# EAGLE board motors_ctrl (EAGLE 5.10)
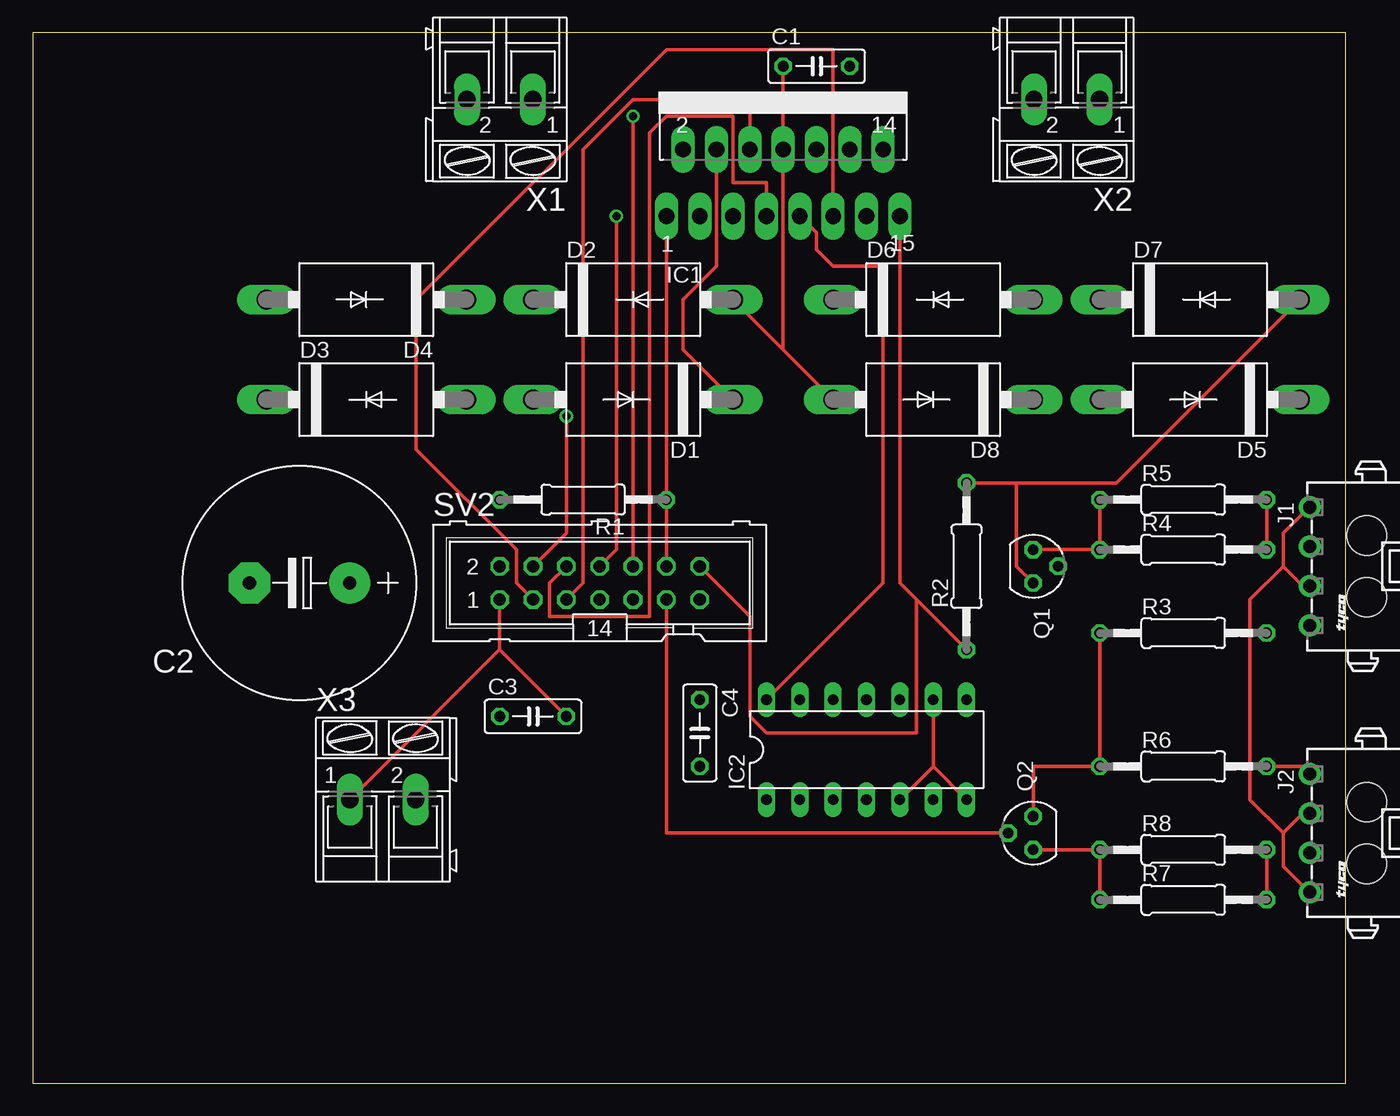
[diagram p0: board, top side]
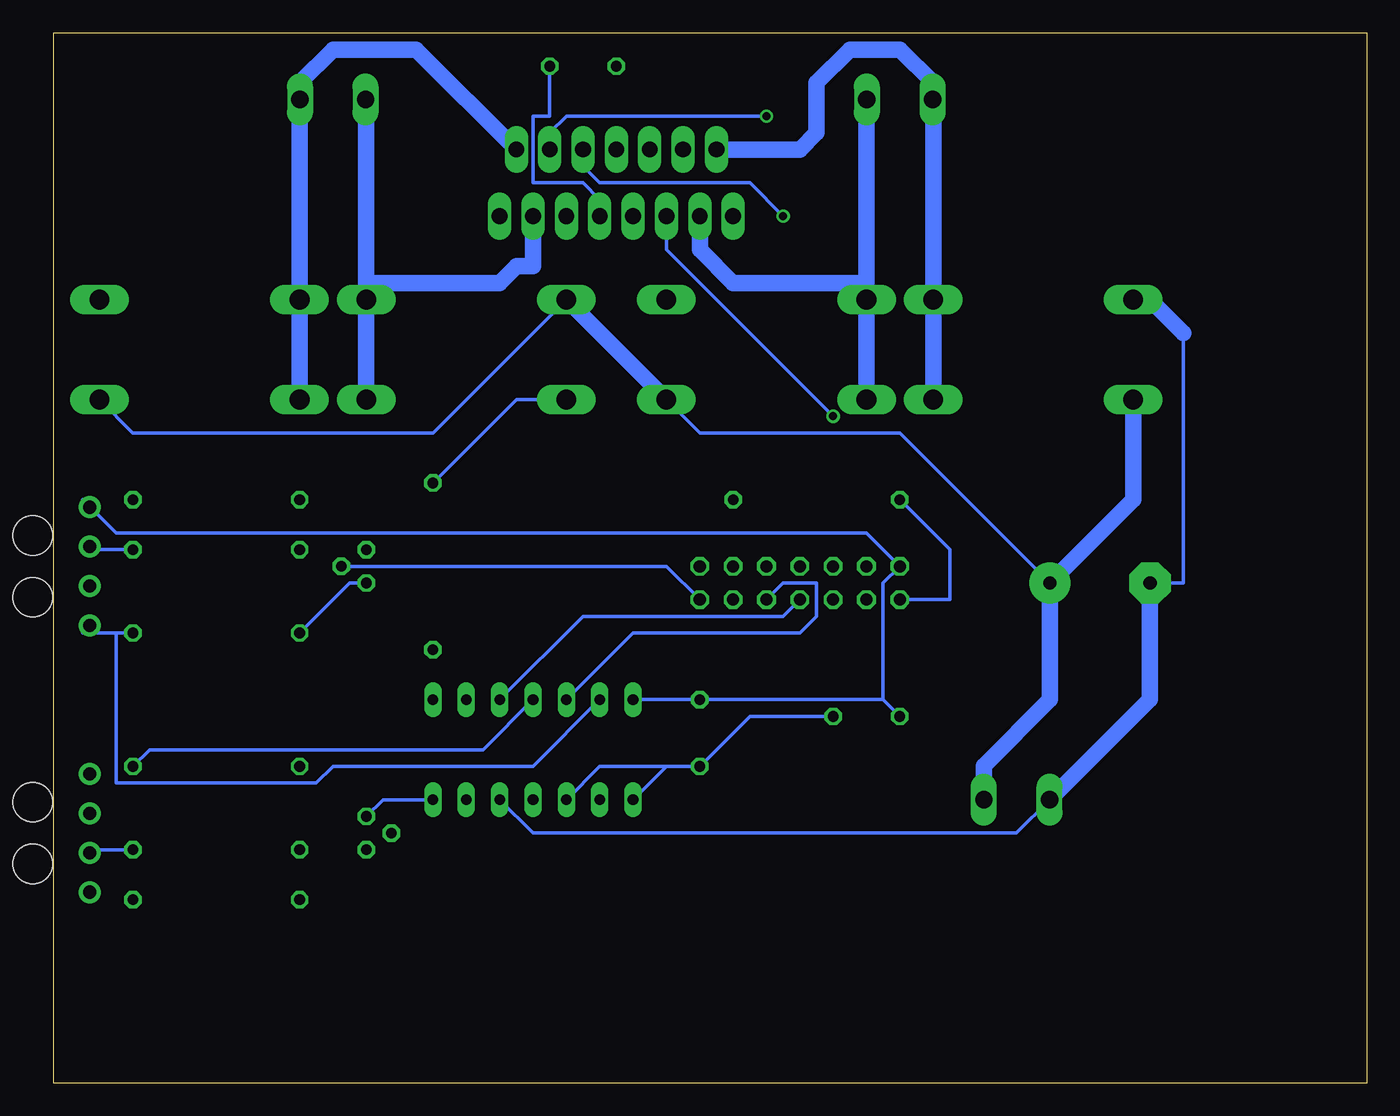
[diagram p1: board, bottom side, seen from below]

Size 100 x 80 mm. Coordinates in mm from the lower left corner, seen from the top.
Outline: 0,0 100,0 100,80 0,80 0,0
Copper layers (1*16): Top 0.035mm / dielectric 1.5mm / Bottom 0.035mm
Design rules "default": minimum track width 10mil, minimum drill 24mil, track to track 8mil, track to pad 8mil, pad to pad 8mil, via to via 8mil, smd to smd 8mil, copper to edge 40mil, drill to drill 8mil, minimum pad ring 10mil, minimum via ring 8mil, stop-mask expansion 4mil, vias tented up to drill 0mil, thermal gap 10mil

## Footprints (pad centres in the part's own frame; a part is rotated, then mirrored left to right if it is on the bottom)
C050-025X075 = drill 0.813 octagon: 1 -2.54,0; 2 2.54,0
E7,5-18 = drill 1.016 pad 3.15 round: + -3.81,0 | drill 1.016 pad 3.15 octagon: - 3.81,0
DO201-15 = drill 1.499 long: A 7.62,0; C -7.62,0
MULTIWATT-15 = drill 1.2 long: 1 -8.89,-7.62; 2 -7.62,-2.54; 3 -6.35,-7.62; 4 -5.08,-2.54; 5 -3.81,-7.62; 6 -2.54,-2.54; 7 -1.27,-7.62; 8 0,-2.54; 9 1.27,-7.62; 10 2.54,-2.54; 11 3.81,-7.62; 12 5.08,-2.54; 13 6.35,-7.62; 14 7.62,-2.54; 15 8.89,-7.62
DIL14 = drill 0.813 long: 1 -7.62,-3.81; 2 -5.08,-3.81; 3 -2.54,-3.81; 4 0,-3.81; 5 2.54,-3.81; 6 5.08,-3.81; 7 7.62,-3.81; 8 7.62,3.81; 9 5.08,3.81; 10 2.54,3.81; 11 0,3.81; 12 -2.54,3.81; 13 -5.08,3.81; 14 -7.62,3.81
1445055-4 = drill 1 pad 1.676 round: 1 4.5,4.32; 2 1.5,4.32; 3 -1.5,4.32; 4 -4.5,4.32 | hole 3: -2.35,0; 2.35,0
SOT54E = drill 0.813 octagon: D -1.27,0; G 0,1.905; S 1.27,0
0207/12 = drill 0.813 octagon: 1 -6.35,0; 2 6.35,0
ML14 = drill 0.914 octagon: 1 -7.62,-1.27; 2 -7.62,1.27; 3 -5.08,-1.27; 4 -5.08,1.27; 5 -2.54,-1.27; 6 -2.54,1.27; 7 0,-1.27; 8 0,1.27; 9 2.54,-1.27; 10 2.54,1.27; 11 5.08,-1.27; 12 5.08,1.27; 13 7.62,-1.27; 14 7.62,1.27
AK300/2 = drill 1.321 long: 1 -2.515,0; 2 2.489,0

## Placement (x,y rotation side)
C1  100nF  [C050-025X075]  59.69,77.47 0 top
C2  [E7,5-18]  20.32,38.1 180 top
C3  10nF  [C050-025X075]  38.1,27.94 0 top
C4  10nF  [C050-025X075]  50.8,26.67 270 top
D1  6A10  [DO201-15]  45.72,52.07 180 top
D2  6A10  [DO201-15]  45.72,59.69 0 top
D3  6A10  [DO201-15]  25.4,52.07 0 top
D4  6A10  [DO201-15]  25.4,59.69 180 top
D5  6A10  [DO201-15]  88.9,52.07 180 top
D6  6A10  [DO201-15]  68.58,59.69 0 top
D7  6A10  [DO201-15]  88.9,59.69 0 top
D8  6A10  [DO201-15]  68.58,52.07 180 top
IC1  L298  [MULTIWATT-15]  57.15,73.66 0 top
IC2  7414N  [DIL14]  63.5,25.4 0 top
J1  TCST1103 (+,E,+,D)  [1445055-4]  101.6,39.37 90 top
J2  TCST1103 (+,E,+,D)  [1445055-4]  101.6,19.05 90 top
Q1  BS170  [SOT54E]  76.2,39.37 270 top
Q2  BS170  [SOT54E]  76.2,19.05 90 top
R1  10kR  [0207/12]  41.91,44.45 180 top
R2  10kR  [0207/12]  71.12,39.37 90 top
R3  100R  [0207/12]  87.63,34.29 0 top
R4  100R  [0207/12]  87.63,40.64 0 top
R5  100R  [0207/12]  87.63,44.45 0 top
R6  100R  [0207/12]  87.63,24.13 0 top
R7  100R  [0207/12]  87.63,13.97 0 top
R8  100R  [0207/12]  87.63,17.78 0 top
SV2  [ML14]  43.18,38.1 0 top
X1  [AK300/2]  35.56,74.93 180 top
X2  [AK300/2]  78.74,74.93 180 top
X3  [AK300/2]  26.67,21.59 0 top

## Library data of the parts
C1-C4 R1-R8 = rcl
D1-D8 = diode
IC1 = st-microelectronics
IC2 = 74xx-eu
J1 J2 = con-amp
Q1 Q2 = transistor-small-signal
SV2 = con-harting-ml
X1-X3 = con-ptr500

## Nets
0V: C1.1 C2.- C3.2 C4.2 D2.A D4.A D7.A D8.A IC1.8 IC2.1 IC2.3 IC2.5 IC2.7 IC2.9 Q1.S Q2.S R1.2 R2.2 R3.1 R6.1 SV2.1 X3.1
+5V: C1.2 C3.1 C4.1 IC1.9 IC2.14 J1.1 J1.3 J2.2 J2.4 SV2.2
+9V: C2.+ D1.C D3.C D5.C D6.C IC1.4 X3.2
N$1: D1.A D2.C IC1.3 X1.1
N$2: D3.A D4.C IC1.2 X1.2
N$3: D6.A D8.C IC1.13 X2.2
N$4: D5.A D7.C IC1.14 X2.1
N$5: IC1.15 R2.1 SV2.14
N$6: IC1.1 R1.1 SV2.12
N$7: IC1.12 SV2.10
N$8: IC1.10 SV2.8
N$9: IC1.7 SV2.6
N$10: IC1.5 SV2.4
N$11: IC1.6 SV2.5
N$12: IC1.11 SV2.3
N$13: Q1.G SV2.13
N$14: IC2.13 J1.4 R3.2
N$15: J1.2 R4.2 R5.2
N$16: Q1.D R4.1 R5.1
N$17: IC2.12 SV2.9
N$18: IC2.11 J2.1 R6.2
N$20: J2.3 R7.2 R8.2
N$21: Q2.D R7.1 R8.1
N$22: Q2.G SV2.11
N$23: IC2.10 SV2.7

## Tracks (layer width: path | path; a pad name or v marks a point on that pad's centre or on a via)
0V
  Top 0.254: 35.56,33.02 C3.2 | 35.56,33.02 SV2.1 | 35.56,33.02 24.13,21.59 X3.1 | IC2.5 68.58,24.13 | 68.58,24.13 IC2.9 | 68.58,24.13 IC2.7 | Q2.S 76.2,24.13 R6.1 R3.1 | C1.1 IC1.8 57.15,55.88 | D8.A 57.15,55.88 | 57.15,55.88 D2.A | D7.A 82.55,45.72 74.93,45.72 | 74.93,45.72 R2.2 | Q1.S 74.93,39.37 74.93,45.72
  Bottom 0.254: 13.97,57.15 13.97,38.1 C2.- | 53.34,24.13 IC2.1 | 53.34,24.13 C4.2 46.99,27.94 C3.2 | IC2.3 58.42,24.13 53.34,24.13 | R1.2 31.75,40.64 31.75,36.83 SV2.1 | Q2.S 74.93,21.59 IC2.7 | R3.1 77.47,38.1 Q1.S | R2.2 64.77,52.07 D8.A | 24.13,21.59 26.67,19.05 63.5,19.05 IC2.5
  Bottom 0.406: X3.1 24.13,21.59
  Bottom 1.27: C2.- 16.51,29.23 X3.1 | D4.A 16.51,59.69 13.97,57.15
+5V
  Top 0.254: 95.25,19.05 95.25,16.51 97.79,13.97 J2.4 | 95.25,19.05 96.52,20.32 J2.2 | 95.25,39.37 96.52,38.1 J1.3 | 95.25,39.37 95.25,41.91 97.79,44.45 J1.1 | 95.25,19.05 92.71,21.59 92.71,36.83 95.25,39.37 | IC1.9 59.69,64.77 59.69,63.5 60.96,62.23 64.77,62.23 64.77,38.1 IC2.14
  Bottom 0.254: C1.2 62.23,73.66 63.5,73.66 63.5,68.58 59.69,68.58 58.42,67.31 IC1.9 | C3.1 36.83,29.21 | 36.83,29.21 C4.1 IC2.14 | 36.83,29.21 36.83,38.1 SV2.2 38.1,41.91 95.25,41.91 97.79,44.45 J1.1
+9V
  Top 0.254: IC1.4 52.07,62.23 49.53,59.69 49.53,55.88 D1.C
  Bottom 0.254: D5.C 93.98,49.53 71.12,49.53 D6.C | C2.+ 35.56,49.53 50.8,49.53 D1.C
  Bottom 1.27: D3.C 17.78,44.45 C2.+ 24.13,29.21 29.16,24.18 X3.2 | D1.C D6.C
N$1
  Bottom 0.254: 38.1,74.93 X1.1
  Bottom 1.27: D1.A D2.C 38.1,60.96 | 38.1,60.96 38.1,74.93 | IC1.3 50.8,63.5 48.26,60.96 38.1,60.96
N$2
  Bottom 1.27: D3.A D4.C 33.02,74.88 X1.2 33.02,74.93 33.02,76.2 35.56,78.74 39.37,78.74 41.91,76.2 41.91,72.39 43.18,71.12 IC1.2
N$3
  Bottom 1.27: X2.2 76.2,74.93 76.2,60.96 | 76.2,60.96 D6.A D8.C | IC1.13 63.5,62.23 64.77,62.23 66.04,60.96 76.2,60.96
N$4
  Bottom 1.27: D5.A D7.C 81.28,74.93 X2.1 81.28,74.95 81.28,76.2 78.74,78.74 72.39,78.74 IC1.14
N$5
  Top 0.254: 67.31,36.83 66.04,38.1 IC1.15 | 67.31,36.83 R2.1 | SV2.14 54.61,35.56 54.61,27.94 55.88,26.67 67.31,26.67 67.31,36.83
N$6
  Top 0.254: SV2.12 R1.1 IC1.1
N$7  (via drill 0.61)
  Top 0.254: SV2.10 v45.72,73.66
  Bottom 0.254: v45.72,73.66 60.96,73.66 62.23,72.39 IC1.12
N$8  (via drill 0.61)
  Top 0.254: SV2.8 44.45,40.64 v44.45,66.04
  Bottom 0.254: v44.45,66.04 46.99,68.58 58.42,68.58 59.69,69.85 IC1.10
N$9
  Top 0.254: SV2.6 39.37,38.1 39.37,35.56 46.99,35.56 46.99,72.39 48.26,73.66 53.34,73.66 53.34,68.58 55.88,68.58 IC1.7
N$10  (via drill 0.61)
  Top 0.254: SV2.4 40.64,41.91 v40.64,50.8
  Bottom 0.254: v40.64,50.8 53.34,63.5 IC1.5
N$11
  Top 0.254: SV2.5 41.91,38.1 41.91,71.12 45.72,74.93 54.61,74.93 IC1.6
N$12
  Top 0.254: SV2.3 36.83,38.1 36.83,40.64 29.21,48.26 29.21,59.69 48.26,78.74 60.96,78.74 IC1.11
N$13
  Bottom 0.254: SV2.13 53.34,39.37 Q1.G
N$14
  Bottom 0.254: IC2.13 63.5,24.13 78.74,24.13 80.01,22.86 95.25,22.86 95.25,34.29 | 95.25,34.29 R3.2 | 95.25,34.29 97.79,34.29 J1.4
N$15
  Top 0.254: R4.2 R5.2
  Bottom 0.254: R4.2 96.52,40.64 J1.2
N$16
  Top 0.254: Q1.D R4.1 R5.1
N$17
  Bottom 0.254: IC2.12 55.88,34.29 43.18,34.29 41.91,35.56 41.91,38.1 44.45,38.1 SV2.9
N$18
  Top 0.254: R6.2 97.79,24.13 J2.1
  Bottom 0.254: IC2.11 67.31,25.4 92.71,25.4 R6.2
N$20
  Top 0.254: R7.2 R8.2
  Bottom 0.254: R8.2 96.52,17.78 J2.3
N$21
  Top 0.254: Q2.D R8.1 R7.1
N$22
  Top 0.254: SV2.11 48.26,19.05 Q2.G
N$23
  Bottom 0.254: IC2.10 59.69,35.56 44.45,35.56 SV2.7